# Altium PCB PCB2.PcbDoc
Units mm, origin at the board's own origin, x right, y up, seen from the top; angles counter-clockwise.
Board outline 82.68 x 49.53 mm, 2 copper layers (Top Layer, Bottom Layer); 52 components, 14 nets, 126 pads, 0 vias.
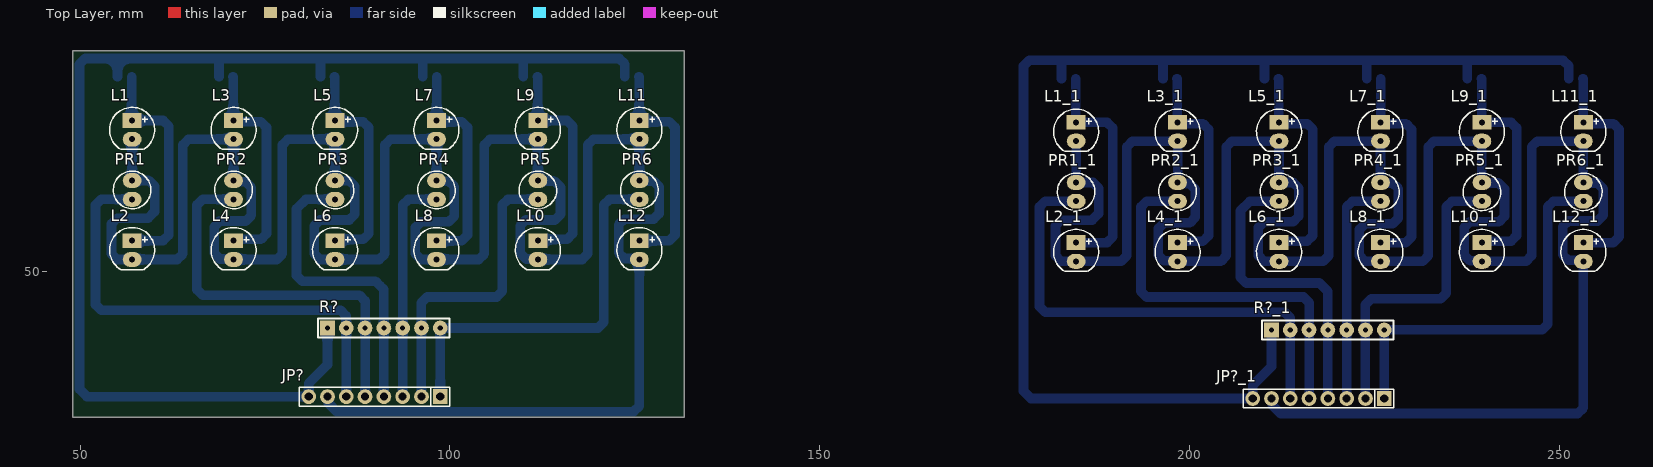
[diagram p0: Top Layer view]
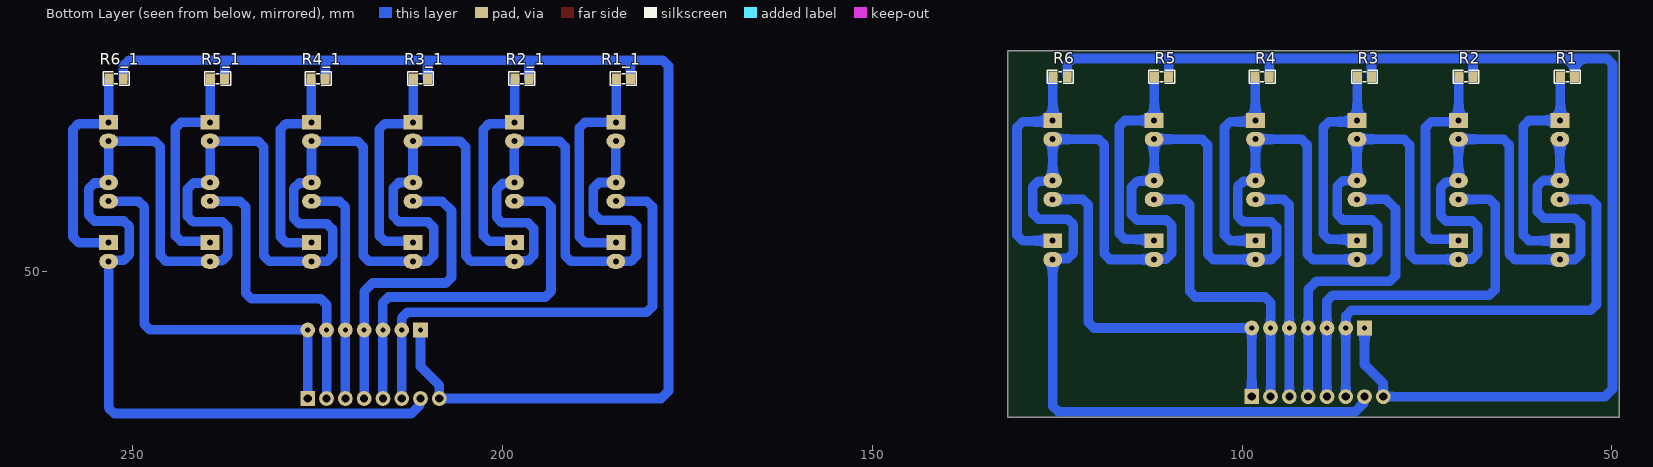
[diagram p1: Bottom Layer view, seen from below]

## Layer stack, top to bottom
Top Solder: solder mask 0.0102, Solder Resist, Dk 3.5
Top Layer: signal copper 0.0356
Dielectric 1: dielectric 0.32, FR-4, Dk 4.8
Bottom Layer: signal copper 0.0356
Bottom Solder: solder mask 0.0102, Solder Resist, Dk 3.5

## Board outline
49.022,30.226 131.699,30.226 131.699,79.756 49.022,79.756

## Design rules (kind name [scope] priority, off if disabled: settings)
Clearance [All] p1: gap=0.254 ignorepadtopadclearanceinfootprint=FALSE except(0: Arc-Hole Track-Hole SMDPad-Hole THPad-Hole Via-Hole Fill-Hole Poly-Hole Region-Hole Text-Hole)
PolygonConnect [All] p1: connectstyle=Relief reliefconductorwidth=0.254 reliefentries=4 polygonreliefangle="90 Angle" airgapwidth=0.254
RoutingVias [All] p1: holewidth=0.711 width=1.27 viastyle="Through Hole" minholewidth=0.711 minwidth=1.27 maxholewidth=0.711 maxwidth=1.27
SolderMaskExpansion [All] p1: expansion=0.102 istentingtop=FALSE
Width [All] p1: maxlimit=1.7 minlimit=0.254 preferedwidth=1.5 toplayer_maxwidth=0.254 toplayer_prefwidth=0.254 bottomlayer_minwidth=1.3 minimp=50.000000 maximp=50.000000 favimp=50.000000
30 further rules are at their usual default settings.

## Components (designator, comment, footprint, x,y, rotation, side; value= is the part's Value field where it differs from the comment)
JP? "JP 1x8 2.54" "JP 1x8 DT" 98.679,33.02 r180 top
JP?_1 "JP 1x8 2.54" "JP 1x8 DT" 226.314,32.766 r180 top (schematic designator JP?)
L1 "LED 5mm" LED-5MM-WHITE 57.023,69.088 r270 top
L1_1 "LED 5mm" LED-5MM-WHITE 184.658,68.834 r270 top (schematic designator L1)
L2 "LED 5mm" LED-5MM-WHITE 57.023,52.832 r270 top
L2_1 "LED 5mm" LED-5MM-WHITE 184.658,52.578 r270 top (schematic designator L2)
L3 "LED 5mm" LED-5MM-WHITE 70.739,69.088 r270 top
L3_1 "LED 5mm" LED-5MM-WHITE 198.374,68.834 r270 top (schematic designator L3)
L4 "LED 5mm" LED-5MM-WHITE 70.739,52.832 r270 top
L4_1 "LED 5mm" LED-5MM-WHITE 198.374,52.578 r270 top (schematic designator L4)
L5 "LED 5mm" LED-5MM-WHITE 84.455,69.088 r270 top
L5_1 "LED 5mm" LED-5MM-WHITE 212.09,68.834 r270 top (schematic designator L5)
L6 "LED 5mm" LED-5MM-WHITE 84.455,52.832 r270 top
L6_1 "LED 5mm" LED-5MM-WHITE 212.09,52.578 r270 top (schematic designator L6)
L7 "LED 5mm" LED-5MM-WHITE 98.171,69.088 r270 top
L7_1 "LED 5mm" LED-5MM-WHITE 225.806,68.834 r270 top (schematic designator L7)
L8 "LED 5mm" LED-5MM-WHITE 98.171,52.832 r270 top
L8_1 "LED 5mm" LED-5MM-WHITE 225.806,52.578 r270 top (schematic designator L8)
L9 "LED 5mm" LED-5MM-WHITE 111.887,69.088 r270 top
L9_1 "LED 5mm" LED-5MM-WHITE 239.522,68.834 r270 top (schematic designator L9)
L10 "LED 5mm" LED-5MM-WHITE 111.887,52.832 r270 top
L10_1 "LED 5mm" LED-5MM-WHITE 239.522,52.578 r270 top (schematic designator L10)
L11 "LED 5mm" LED-5MM-WHITE 125.603,69.088 r270 top
L11_1 "LED 5mm" LED-5MM-WHITE 253.238,68.834 r270 top (schematic designator L11)
L12 "LED 5mm" LED-5MM-WHITE 125.603,52.832 r270 top
L12_1 "LED 5mm" LED-5MM-WHITE 253.238,52.578 r270 top (schematic designator L12)
PR1 "Quang Tro" "Quang Tro" 57.023,59.69 r90 top
PR1_1 "Quang Tro" "Quang Tro" 184.658,59.436 r90 top (schematic designator PR1)
PR2 "Quang Tro" "Quang Tro" 70.739,59.69 r90 top
PR2_1 "Quang Tro" "Quang Tro" 198.374,59.436 r90 top (schematic designator PR2)
PR3 "Quang Tro" "Quang Tro" 84.455,59.69 r90 top
PR3_1 "Quang Tro" "Quang Tro" 212.09,59.436 r90 top (schematic designator PR3)
PR4 "Quang Tro" "Quang Tro" 98.171,59.69 r90 top
PR4_1 "Quang Tro" "Quang Tro" 225.806,59.436 r90 top (schematic designator PR4)
PR5 "Quang Tro" "Quang Tro" 111.887,59.69 r90 top
PR5_1 "Quang Tro" "Quang Tro" 239.522,59.436 r90 top (schematic designator PR5)
PR6 "Quang Tro" "Quang Tro" 125.603,59.69 r90 top
PR6_1 "Quang Tro" "Quang Tro" 253.238,59.436 r90 top (schematic designator PR6)
R1 "100R" "tro smd 0805" 56.007,76.327 r180 bottom
R1_1 "100R" "tro smd 0805" 183.642,76.073 r180 bottom (schematic designator R1)
R2 "100R" "tro smd 0805" 69.723,76.327 r180 bottom
R2_1 "100R" "tro smd 0805" 197.358,76.073 r180 bottom (schematic designator R2)
R3 "100R" "tro smd 0805" 83.439,76.327 r180 bottom
R3_1 "100R" "tro smd 0805" 211.074,76.073 r180 bottom (schematic designator R3)
R4 "100R" "tro smd 0805" 97.282,76.327 r180 bottom
R4_1 "100R" "tro smd 0805" 224.917,76.073 r180 bottom (schematic designator R4)
R5 "100R" "tro smd 0805" 110.871,76.327 r180 bottom
R5_1 "100R" "tro smd 0805" 238.506,76.073 r180 bottom (schematic designator R5)
R6 "100R" "tro smd 0805" 124.587,76.327 r180 bottom
R6_1 "100R" "tro smd 0805" 252.222,76.073 r180 bottom (schematic designator R6)
R? "1k" "tro bang a7" 91.059,42.291 r0 top
R?_1 "1k" "tro bang a7" 218.694,42.037 r0 top (schematic designator R?)

## Footprints (in the part's own frame and the unit in brackets; to place one, negate y for a bottom-side part, rotate by r counter-clockwise, add the part's x,y. Pads: shape width x height; smd on the part's side, far side on the other; paste and mask are expansions set on the pad)
"JP 1x8 DT" [mm] "8 pins, 1 row, straight, gold plating"
  rect 2x2 hole 1.1: 1(0,0)
  round 2 hole 1.1: 2(2.54,0) 3(5.08,0) 4(7.62,0) 5(10.16,0) 6(12.7,0) 7(15.24,0) 8(17.78,0)
  silkscreen extent -1.27,-1.27 19.05,1.27, body extent -1.27,-1.27 19.05,1.27, height 8.54
LED-5MM-WHITE [mm] "LED 2 PIN, 5 ly , Only colour, pin to pin 110mil"
  rect 2x2.54 hole 0.813: 1(-1.27,0)
  oval 2x2.54 hole 0.813: 2(1.27,0)
  silkscreen extent -3.04,-3.05 2.64,3.04, body extent -3.15,-3.18 3.07,3.05, height 8.64
"Quang Tro" [mm] "QUANG TRO"
  oval 2x2.54 hole 0.813: 1(0,0) 2(2.54,0)
  silkscreen extent -1.27,-2.54 3.81,2.54
"tro bang a7" [mm]
  rect 2x2 hole 0.7: 1(-7.62,0)
  round 2 hole 0.7: 2(-5.08,0) 3(-2.54,0) 4(0,0) 5(2.54,0) 6(5.08,0) 7(7.62,0)
  silkscreen extent -8.89,-1.27 8.89,1.27, body extent -8.86,-1.22 8.87,1.27, height 5.94
"tro smd 0805" [mm]
  rect 1.2x1.4 smd: 1(-0.946,-0.061) 2(0.954,-0.061)
  silkscreen extent -1.75,-0.97 1.75,0.84, body extent -1.56,-0.76 1.44,0.64, height 0.53

## Part data
JP? JP?_1: library part "JP 1x8 2.54 Duc Thang", "Cắm", Chung_Loai=Cắm, Don_Vi=Con, Ma_Hang=MH000903, Ten_Linh_Kien="Jump Đơn Đực 2.54MM 1x40P Thẳng 11MM"
L1 L1_1 L2 L2_1 L3 L3_1 L4 L4_1 L5 L5_1 L6 L6_1 L7 L7_1 L8 L8_1 L9 L9_1 L10 L10_1 L11 L11_1 L12 L12_1: library part "LED 5mm Trang", "Cắm", Chung_Loai=Cắm, Don_Vi=Con, Ma_Hang=MH008983, Ten_Linh_Kien="Led 5MM Trắng Đục (1000c)"
PR1 PR1_1 PR2 PR2_1 PR3 PR3_1 PR4 PR4_1 PR5 PR5_1 PR6 PR6_1: "Photoresistor", Creator="Bien Nguyen"
R1 R1_1 R2 R2_1 R3 R3_1 R4 R4_1 R5 R5_1 R6 R6_1: library part "Tro 0805 5% 100R", "Dán", Chung_Loai=Dán, Don_Vi=Con, Ma_Hang=MH005251, So_Chan=2, Ten_Linh_Kien="Trở 0805 5% 100R"
R? R?_1: library part "Tro Bang A7 1k", "Cắm", Chung_Loai=Cắm, Don_Vi=Con, Ma_Hang=MH002004, So_Chan=7, Ten_Linh_Kien="Trở Băng A07-102 1K 1/8W 5%"

## Nets (pads, with @x,y where several pads share a name; then routed paths per layer and width w, separated by ;. In a path a pad name is that pad's centre, name@x,y a point inside that pad or via, vN(x,y) a via of type N, cw(c..) or ccw(c..) an arc to the next point about the centre after c; other vN are vias at no path point)
+5: JP?.8 R1.2 R2.2 R3.2 R4.2 R5.2 R6.2 R?.1 | length 174.2
  Bottom Layer w1.3: R1.2 55.053,78.74 ; R2.2 68.769,78.678 68.707,78.74 ; R3.2 82.485,78.678 82.423,78.74 ; R?.1 83.439,37.338 80.899,34.798 JP?.8 50.927,33.02 49.911,34.036 49.911,77.978 50.673,78.74 55.053,78.74 ; R4.2 96.328,78.678 96.266,78.74 ; R5.2 109.917,78.678 109.855,78.74 ; R6.2 123.633,77.978 122.871,78.74 109.855,78.74 ; 55.053,78.74 68.707,78.74 ; 68.707,78.74 82.423,78.74 ; 82.423,78.74 96.266,78.74 ; 96.266,78.74 109.855,78.74
GND: JP?.7 L1.2 L2.2 L3.2 L4.2 L5.2 L6.2 L7.2 L8.2 L9.2 L10.2 L11.2 L12.2 PR1.2 PR2.2 PR3.2 PR4.2 PR5.2 PR6.2 | length 360.2
  Bottom Layer w1.3: PR1.2@56.769,62.23 59.309,62.23 60.071,61.468 60.071,58.039 59.17,57.138 54.991,57.138 54.229,56.376 54.229,52.324 54.991,51.562 56.896,51.562 63.119,51.562 63.881,52.324 63.881,67.056 64.643,67.818 L3.2 PR2.2 70.873,62.096 72.334,62.096 73.152,61.278 73.152,57.531 72.39,56.769 68.893,56.769 68.132,56.007 68.132,52.391 68.893,51.629 70.672,51.629 L4.2 76.581,51.562 77.343,52.324 77.343,67.056 78.105,67.818 L5.2 PR3.2 86.36,62.23 87.122,61.468 87.122,57.658 86.36,56.896 82.423,56.896 81.661,56.134 81.661,52.324 82.423,51.562 L6.2 90.424,51.562 91.186,52.324 91.186,67.056 91.948,67.818 L7.2 98.238,67.751 98.171,67.684 PR4.2 98.238,62.163 99.822,62.163 100.584,61.401 100.584,57.404 99.822,56.642 96.072,56.642 95.31,55.88 95.31,52.324 96.072,51.562 L8.2 103.886,51.562 104.648,52.324 104.648,67.056 105.41,67.818 L9.2 PR5.2 111.954,62.163 114.113,62.163 114.935,61.341 114.935,57.658 114.173,56.896 110.236,56.896 109.474,56.134 109.474,52.442 110.287,51.629 111.82,51.629 L10.2 117.856,51.562 118.618,52.324 118.618,67.056 119.38,67.818 L11.2 125.67,67.751 125.698,67.751 125.603,67.656 PR6.2 125.67,62.163 127.508,62.163 128.27,61.401 128.27,57.785 127.508,57.023 123.571,57.023 122.809,56.261 122.809,52.457 123.571,51.696 125.025,51.696 L12.2@125.091,51.629 ; PR1.2 L1.2 ; JP?.7 83.573,32.886 83.573,32.094 84.679,30.988 124.841,30.988 125.603,31.75 L12.2
NetJP?_1: JP?.1 PR6.1 R?.7 | length 52.7
  Bottom Layer w1.3: JP?.1 98.679,42.083 R?.7 120.015,42.291 120.777,43.053 120.777,58.928 121.539,59.69 PR6.1
NetJP?_2: JP?.2 PR5.1 R?.6 | length 41.1
  Bottom Layer w1.3: JP?.2 96.139,45.72 96.901,46.482 106.299,46.482 107.061,47.244 107.061,58.928 107.823,59.69 PR5.1
NetJP?_3: JP?.3 PR4.1 R?.5 | length 30.8
  Bottom Layer w1.3: JP?.3 R?.5 93.599,58.928 94.361,59.69 PR4.1
NetJP?_4: JP?.4 PR3.1 R?.4 | length 41.8
  Bottom Layer w1.3: PR3.1 80.518,59.69 79.248,58.42 79.248,49.403 80.01,48.641 89.916,48.641 90.551,48.006 91.059,47.498 R?.4 JP?.4
NetJP?_5: JP?.5 PR2.1 R?.3 | length 53
  Bottom Layer w1.3: PR2.1 66.548,59.69 65.786,58.928 65.786,47.498 66.548,46.736 87.757,46.736 88.519,45.974 R?.3 JP?.5
NetJP?_6: JP?.6 PR1.1 R?.2 | length 64.2
  Bottom Layer w1.3: PR1.1 52.832,59.69 52.07,58.928 52.07,45.466 52.832,44.704 85.198,44.704 85.96,43.942 85.96,42.31 R?.2 JP?.6
NetL1_1: L1.1 L2.1 R1.1 | length 31.2
  Bottom Layer w1.3: R1.1 56.953,70.428 L1.1 61.214,70.358 61.976,69.596 61.976,54.864 61.214,54.102 L2.1
NetL3_1: L3.1 L4.1 R2.1 | length 30
  Bottom Layer w1.3: R2.1 70.704,76.231 70.704,70.393 70.914,70.183 74.422,70.183 75.184,69.421 75.184,55.039 74.422,54.277 70.914,54.277 L4.1
NetL5_1: L5.1 L6.1 R3.1 | length 30.2
  Bottom Layer w1.3: R3.1 84.42,76.231 84.42,70.393 84.63,70.183 88.265,70.183 89.027,69.421 89.027,55.039 88.265,54.277 84.63,54.277 L6.1
NetL7_1: L7.1 L8.1 R4.1 | length 29.6
  Bottom Layer w1.3: L8.1 101.6,54.102 102.362,54.864 102.362,69.421 101.6,70.183 98.346,70.183 L7.1 98.199,70.386 98.199,76.238 R4.1
NetL9_1: L9.1 L10.1 R5.1 | length 30.6
  Bottom Layer w1.3: R5.1 111.852,76.231 111.852,70.393 L9.1 115.824,70.358 116.586,69.596 116.586,55.039 115.824,54.277 112.062,54.277 L10.1
NetL11_1: L11.1 L12.1 R6.1 | length 30.9
  Bottom Layer w1.3: R6.1 125.568,76.231 125.568,70.393 L11.1 125.778,70.183 129.667,70.183 130.429,69.421 130.429,54.864 129.667,54.102 L12.1
pads on no net: JP?_1.1 JP?_1.2 JP?_1.3 JP?_1.4 JP?_1.5 JP?_1.6 JP?_1.7 JP?_1.8 L1_1.1 L1_1.2 L2_1.1 L2_1.2 L3_1.1 L3_1.2 L4_1.1 L4_1.2 L5_1.1 L5_1.2 L6_1.1 L6_1.2 L7_1.1 L7_1.2 L8_1.1 L8_1.2 L9_1.1 L9_1.2 L10_1.1 L10_1.2 L11_1.1 L11_1.2 L12_1.1 L12_1.2 PR1_1.1 PR1_1.2 PR2_1.1 PR2_1.2 PR3_1.1 PR3_1.2 PR4_1.1 PR4_1.2 PR5_1.1 PR5_1.2 PR6_1.1 PR6_1.2 R1_1.1 R1_1.2 R2_1.1 R2_1.2 R3_1.1 R3_1.2 R4_1.1 R4_1.2 R5_1.1 R5_1.2 R6_1.1 R6_1.2 R?_1.1 R?_1.2 R?_1.3 R?_1.4 R?_1.5 R?_1.6 R?_1.7
copper on no net: | length 1000
  Bottom Layer w1.3: 182.688,76.012 182.688,78.486 ; 184.404,61.976 186.944,61.976 187.706,61.214 187.706,57.785 186.805,56.884 182.626,56.884 181.864,56.122 181.864,52.07 182.626,51.308 184.531,51.308 190.754,51.308 191.516,52.07 191.516,66.802 192.278,67.564 198.374,67.564 198.374,61.976 198.508,61.842 199.969,61.842 200.787,61.024 200.787,57.277 200.025,56.515 196.528,56.515 195.767,55.753 195.767,52.137 196.528,51.375 198.307,51.375 198.374,51.308 204.216,51.308 204.978,52.07 204.978,66.802 205.74,67.564 212.09,67.564 212.09,61.976 213.995,61.976 214.757,61.214 214.757,57.404 213.995,56.642 210.058,56.642 209.296,55.88 209.296,52.07 210.058,51.308 212.09,51.308 218.059,51.308 218.821,52.07 218.821,66.802 219.583,67.564 225.806,67.564 225.873,67.497 225.806,67.43 225.806,61.976 225.873,61.909 227.457,61.909 228.219,61.147 228.219,57.15 227.457,56.388 223.707,56.388 222.945,55.626 222.945,52.07 223.707,51.308 225.806,51.308 231.521,51.308 232.283,52.07 232.283,66.802 233.045,67.564 239.522,67.564 239.522,61.976 239.589,61.909 241.748,61.909 242.57,61.087 242.57,57.404 241.808,56.642 237.871,56.642 237.109,55.88 237.109,52.188 237.922,51.375 239.455,51.375 239.522,51.308 245.491,51.308 246.253,52.07 246.253,66.802 247.015,67.564 253.238,67.564 253.305,67.497 253.333,67.497 253.238,67.402 253.238,61.976 253.305,61.909 255.143,61.909 255.905,61.147 255.905,57.531 255.143,56.769 251.206,56.769 250.444,56.007 250.444,52.203 251.206,51.442 252.66,51.442 252.726,51.375 ; 184.588,76.012 184.588,70.174 184.658,70.104 188.849,70.104 189.611,69.342 189.611,54.61 188.849,53.848 184.658,53.848 ; 184.658,59.436 180.467,59.436 179.705,58.674 179.705,45.212 180.467,44.45 212.833,44.45 213.595,43.688 213.595,42.056 213.614,42.037 213.614,32.766 ; 184.658,61.976 184.658,67.564 ; 196.404,76.012 196.404,78.424 196.342,78.486 ; 198.304,76.012 198.339,75.977 198.339,70.139 198.549,69.929 201.803,69.929 202.565,69.167 202.565,54.785 201.803,54.023 198.549,54.023 198.374,53.848 ; 198.374,59.436 194.183,59.436 193.421,58.674 193.421,47.244 194.183,46.482 215.392,46.482 216.154,45.72 216.154,42.037 216.154,32.766 ; 210.12,76.012 210.12,78.424 210.058,78.486 ; 211.074,32.766 211.208,32.632 211.208,31.84 212.314,30.734 252.476,30.734 253.238,31.496 253.238,51.308 ; 211.074,42.037 211.074,37.084 208.534,34.544 208.534,32.766 178.562,32.766 177.546,33.782 177.546,77.724 178.308,78.486 182.688,78.486 ; 212.02,76.012 212.055,75.977 212.055,70.139 212.265,69.929 215.9,69.929 216.662,69.167 216.662,54.785 215.9,54.023 212.265,54.023 212.09,53.848 ; 212.09,59.436 208.153,59.436 206.883,58.166 206.883,49.149 207.645,48.387 217.551,48.387 218.186,47.752 218.694,47.244 218.694,42.037 218.694,32.766 ; 221.234,32.766 221.234,42.037 221.234,58.674 221.996,59.436 225.806,59.436 ; 223.774,32.766 223.774,45.466 224.536,46.228 233.934,46.228 234.696,46.99 234.696,58.674 235.458,59.436 239.522,59.436 ; 223.963,76.012 223.963,78.424 223.901,78.486 ; 225.806,53.848 229.235,53.848 229.997,54.61 229.997,69.167 229.235,69.929 225.981,69.929 225.806,70.104 225.834,70.132 225.834,75.984 225.863,76.012 ; 226.314,32.766 226.314,41.829 226.314,42.037 247.65,42.037 248.412,42.799 248.412,58.674 249.174,59.436 253.238,59.436 ; 237.552,76.012 237.552,78.424 237.49,78.486 ; 239.452,76.012 239.487,75.977 239.487,70.139 239.522,70.104 243.459,70.104 244.221,69.342 244.221,54.785 243.459,54.023 239.697,54.023 239.522,53.848 ; 251.268,76.012 251.268,77.724 250.506,78.486 237.49,78.486 ; 253.168,76.012 253.203,75.977 253.203,70.139 253.238,70.104 253.413,69.929 257.302,69.929 258.064,69.167 258.064,54.61 257.302,53.848 253.238,53.848 ; 182.688,78.486 196.342,78.486 ; 196.342,78.486 210.058,78.486 ; 210.058,78.486 223.901,78.486 ; 223.901,78.486 237.49,78.486